# EAGLE board Twatch v2b (EAGLE 5.07)
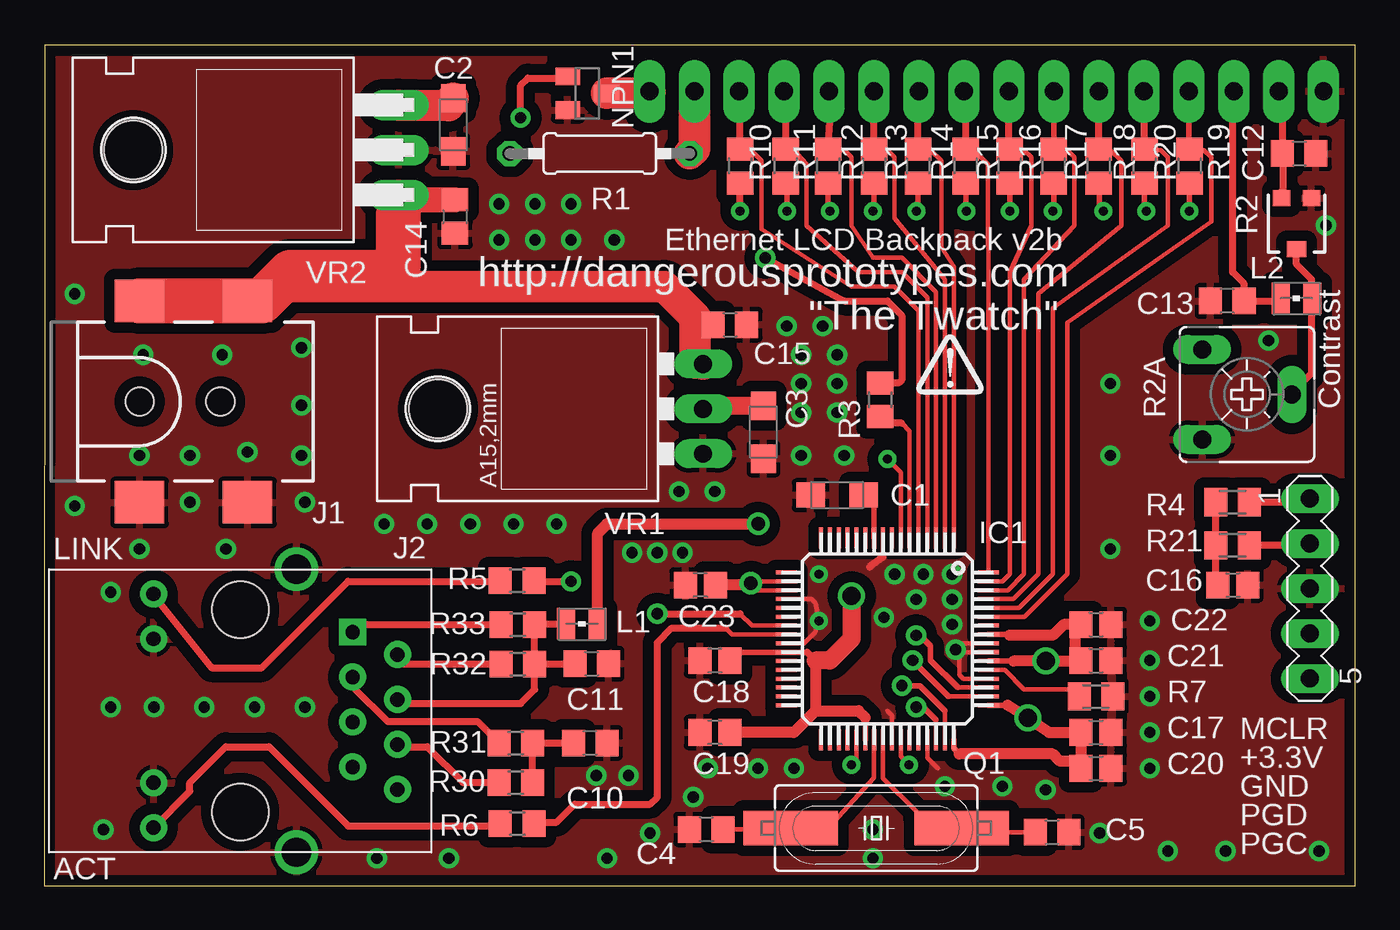
[diagram p0: board, top side]
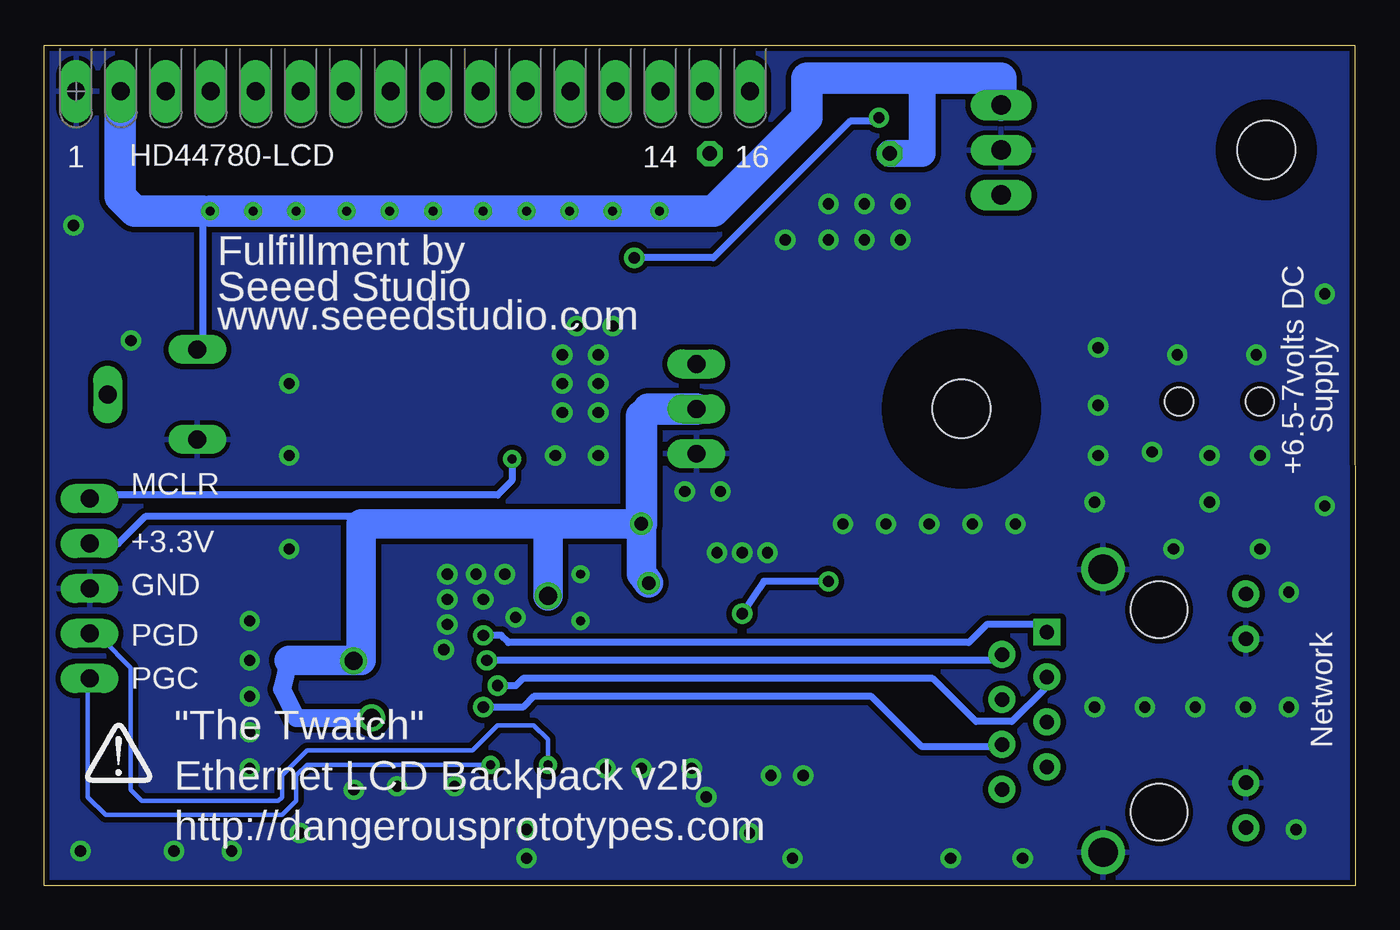
[diagram p1: board, bottom side, seen from below]

Size 74.09 x 47.49 mm. Coordinates in mm from the lower left corner, seen from the top.
Outline: 0,0 74.08,0 74.09,47.49 0.04,47.49 0,0
Copper layers (1*16): Top 0.035mm / dielectric 1.5mm / Bottom 0.035mm
Design rules "SparkFun": minimum track width 8mil, minimum drill 20mil, track to track 8mil, track to pad 8mil, pad to pad 8mil, via to via 8mil, smd to smd 8mil, copper to edge 10mil, drill to drill 8mil, minimum pad ring 12mil, minimum via ring 10mil, stop-mask expansion 4mil, vias tented up to drill 25mil, thermal gap 10mil

## Footprints (pad centres in the part's own frame; a part is rotated, then mirrored left to right if it is on the bottom)
SMC_A = smd 1.6 x 1.4: + -1.5,0; - 1.5,0
C0805 = smd 1.3 x 1.5: 1 -0.95,0; 2 0.95,0
C0805' = smd 1.3 x 1.5: 1 -0.85,0; 2 0.85,0
HD44780 = drill 1.016 pad 1.778 long: 1 -20.325,0.007; 2 -17.785,0.007; 3 -15.245,0.007; 4 -12.705,0.007; 5 -10.165,0.007; 6 -7.625,0.007; 7 -5.085,0.007; 8 -2.545,0.007; 9 -0.005,0.007; 10 2.535,0.007; 11 5.075,0.007; 12 7.615,0.007; 13 10.155,0.007; 14 12.695,0.007; 15 15.235,0.007; 16 17.775,0.007
TQFP64-10X10 = smd 1.2 x 0.229: 1 -5.7,3.75; 2 -5.7,3.25; 3 -5.7,2.75; 4 -5.7,2.25; 5 -5.7,1.75; 6 -5.7,1.25; 7 -5.7,0.75; 8 -5.7,0.25; 9 -5.7,-0.25; 10 -5.7,-0.75; 11 -5.7,-1.25; 12 -5.7,-1.75; 13 -5.7,-2.25; 14 -5.7,-2.75; 15 -5.7,-3.25; 16 -5.7,-3.75; 33 5.7,-3.75; 34 5.7,-3.25; 35 5.7,-2.75; 36 5.7,-2.25; 37 5.7,-1.75; 38 5.7,-1.25; 39 5.7,-0.75; 40 5.7,-0.25; 41 5.7,0.25; 42 5.7,0.75; 43 5.7,1.25; 44 5.7,1.75; 45 5.7,2.25; 46 5.7,2.75; 47 5.7,3.25; 48 5.7,3.75 | smd 0.229 x 1.2: 17 -3.75,-5.7; 18 -3.25,-5.7; 19 -2.75,-5.7; 20 -2.25,-5.7; 21 -1.75,-5.7; 22 -1.25,-5.7; 23 -0.75,-5.7; 24 -0.25,-5.7; 25 0.25,-5.7; 26 0.75,-5.7; 27 1.25,-5.7; 28 1.75,-5.7; 29 2.25,-5.7; 30 2.75,-5.7; 31 3.25,-5.7; 32 3.75,-5.7; 49 3.75,5.7; 50 3.25,5.7; 51 2.75,5.7; 52 2.25,5.7; 53 1.75,5.7; 54 1.25,5.7; 55 0.75,5.7; 56 0.25,5.7; 57 -0.25,5.7; 58 -0.75,5.7; 59 -1.25,5.7; 60 -1.75,5.7; 61 -2.25,5.7; 62 -2.75,5.7; 63 -3.25,5.7; 64 -3.75,5.7
MA05-1 = drill 1.016 long: 1 -5.08,0; 2 -2.54,0; 3 0,0; 4 2.54,0; 5 5.08,0
POWER_JACK_SMD = smd 2.8 x 2.4: GND 0,-5.7; P$4 6.1,-5.7; VIN0 0,5.7; VIN1 6.1,5.7 | hole 1.6: 0,0; 4.572,0
HR911105A = drill 0.813 pad 1.524 square: 1 4.445,-6.35 | drill 0.813 pad 1.524 round: 2 3.175,-8.89; 3 1.905,-6.35; 4 0.635,-8.89; 5 -0.635,-6.35; 6 -1.905,-8.89; 7 -3.175,-6.35; 8 -4.445,-8.89; 9 6.604,4.902; 10 4.064,4.902; 11 -4.064,4.902; 12 -6.604,4.902 | drill 1.651 pad 2.159 round: 13 8.001,-3.175; 14 -8.001,-3.175 | hole 3.2: 5.715,0; -5.715,0
WE-KI_0805_B = smd 1.02 x 1.78: 1 -0.89,0; 2 0.89,0
SOT23 = smd 1 x 1.4: 1 -0.95,-1.1; 2 0.95,-1.1; 3 0,1.1
HC49UP = smd 5.334 x 1.93: 1 -4.826,0; 2 4.826,0
0207/10 = drill 0.813 octagon: 1 -5.08,0; 2 5.08,0
TRIMPOT-3MM = smd 1 x 0.9: 1 -0.85,-1.45; 3 0.85,-1.45 | smd 1.1 x 0.9: 2 0,1.45
CA6V = drill 1.016 long: A -2.54,-2.54; E 2.54,-2.54; S 0,2.54
R0805 = smd 1.3 x 1.5: 1 -0.95,0; 2 0.95,0
M0805 = smd 1.3 x 1.6: 1 -0.95,0; 2 0.95,0
TO220L1 = drill 1.016 long: 1 -2.54,-3.81; 2 0,-3.81; 3 2.54,-3.81 | hole 3.302: 0,11.176
TO220H = drill 1.118 long: 1 -2.54,-10.16; 2 0,-10.16; 3 2.54,-10.16 | hole 3.302: 0,4.826

## Placement (x,y rotation side)
C1  10uF  [SMC_A]  44.81,22.07 180 top
C2  10uF  [SMC_A]  23.11,43 270 top
C3  10uF  [SMC_A]  40.64,25.62 270 top
C4  27pf  [C0805]  37.41,3.17 180 top
C5  27pf  [C0805]  56.95,3.02 0 top
C10  0.1uF  [C0805]  30.85,8.06 180 top
C11  0.1uF  [C0805]  30.94,12.54 0 top
C12  0.1uF  [C0805]  70.92,41.37 0 top
C13  0.1uF  [C0805]  66.85,33.04 180 top
C14  0.1uF  [C0805]  23.22,37.82 270 top
C15  0.1uF  [C0805]  38.75,31.69 0 top
C16  0.1uF  [C0805']  67.16,16.99 0 top
C17  0.1uF  [C0805']  59.44,8.66 0 top
C18  0.1uF  [C0805']  37.9,12.72 180 top
C19  0.1uF  [C0805']  37.9,8.66 180 top
C20  0.1uF  [C0805']  59.44,6.62 0 top
C21  0.1uF  [C0805']  59.44,12.72 0 top
C22  0.1uF  [C0805']  59.44,14.75 0 top
C23  0.1uF  [C0805']  37.08,16.99 180 top
HD44780-LCD  HD44780-LCD  [HD44780]  51.97,44.88 0 bottom
IC1  18F6XJ6X  [TQFP64-10X10]  47.65,13.94 270 top
ICSP  [MA05-1]  71.53,16.78 270 top
J1  POWER_JACKSMD  [POWER_JACK_SMD]  5.38,27.35 0 top
J2  HR911105A  [HR911105A]  11.07,9.88 90 top
L1  ferrite bead  [WE-KI_0805_B]  30.38,14.79 180 top
L2  Ferrite bead  [WE-KI_0805_B]  70.76,33.19 180 top
NPN1  [SOT23]  30.68,44.78 270 top
Q1  25Mhz  [HC49UP]  47.02,3.25 0 top
R1  3R  [0207/10]  31.39,41.37 0 top
R2  TRIMPOTSMD  [TRIMPOT-3MM]  70.76,37.41 180 top
R2A  [CA6V]  67.97,27.76 270 top
R3  100R  [R0805]  47.24,27.45 90 top
R4  390  [M0805]  67.16,21.66 0 top
R5  390R  [R0805]  26.72,17.24 180 top
R6  390R  [R0805]  26.72,3.5 180 top
R7  2k26 1%  [M0805]  59.44,10.69 180 top
R10  10K  [R0805]  39.32,40.66 270 top
R11  10K  [R0805]  41.91,40.66 270 top
R12  10K  [R0805]  44.3,40.66 270 top
R13  10K  [R0805]  46.89,40.66 270 top
R14  10K  [R0805]  49.38,40.66 270 top
R15  10K  [R0805]  52.07,40.66 270 top
R16  10K  [R0805]  54.56,40.66 270 top
R17  10K  [R0805]  57.05,40.66 270 top
R18  10K  [R0805]  59.59,40.66 270 top
R19  10K  [R0805]  62.18,40.66 270 top
R20  10K  [R0805]  64.72,40.66 270 top
R21  10k  [M0805]  67.16,19.22 0 top
R30  49R9 1%  [R0805]  26.66,5.82 0 top
R31  49R9 1%  [R0805]  26.66,8.05 0 top
R32  49R9 1%  [R0805]  26.77,12.52 0 top
R33  49R9 1%  [R0805]  26.77,14.74 0 top
U$1  [DP-LOGO-BOTTOM]  67.97,5.81 0 top
U$2  [DP-LOGO_TOP]  49.28,27.76 0 top
VR1  LD117AV  [TO220L1]  33.43,26.94 90 top
VR2  7805T  [TO220H]  9.86,41.57 90 top

## Library data of the parts
C1-C5 C10-C15 R1 R3-R7 R10-R21 R30-R33 = rcl
C16-C23 = quantum-sensor
HD44780-LCD = lcd-hd44780
IC1 = microchip_enet
ICSP = con-lstb
J1 NPN1 R2 = SparkFun
J2 = CONNECTER
L1 L2 = wuerth-elektronik
Q1 = crystal
R2A = pot
U$1 U$2 = DP-logo
VR1 = v-reg
VR2 = linear

## Nets
+5V: C2.+ C12.1 HD44780-LCD.2 R1.1 R2.3 R2A.A R10.2 R11.2 R12.2 R13.2 R14.2 R15.2 R16.2 R17.2 R18.2 R19.2 R20.2 VR2.3
CCT: C11.1 J2.4 L1.2 R32.2 R33.2
GND: C1.- C2.- C3.- C4.2 C5.2 C10.1 C11.2 C12.2 C13.2 C14.2 C15.2 C16.2 C17.2 C18.2 C19.2 C20.2 C21.2 C22.2 C23.2 HD44780-LCD.1 IC1.9 IC1.20 IC1.25 IC1.41 IC1.45 IC1.52 IC1.55 IC1.56 ICSP.3 J1.GND J1.P$4 J2.10 J2.11 J2.13 J2.14 NPN1.2 R2.1 R2A.E R7.1 VR1.1 VR2.2
LCD_BL: IC1.6 R3.1
LCD_D0: HD44780-LCD.7 IC1.62 R17.1
LCD_D1: HD44780-LCD.8 IC1.63 R16.1
LCD_D2: HD44780-LCD.9 IC1.64 R15.1
LCD_D3: HD44780-LCD.10 IC1.1 R14.1
LCD_D4: HD44780-LCD.11 IC1.2 R13.1
LCD_D5: HD44780-LCD.12 IC1.3 R12.1
LCD_D6: HD44780-LCD.13 IC1.4 R11.1
LCD_D7: HD44780-LCD.14 IC1.5 R10.1
LCD_E: HD44780-LCD.6 IC1.61 R18.1
LCD_RS: HD44780-LCD.4 IC1.59 R20.1
LCD_RW: HD44780-LCD.5 IC1.60 R19.1
LED_A: IC1.24 R6.1
LED_B: IC1.23 R5.1
LED_LINK: J2.9 R5.2
LED_STATUS: J2.12 R6.2
MCLR: IC1.7 ICSP.1 R4.2
N$10: L2.1 R2.2 R2A.S
N$11: NPN1.1 R3.2
N$14: C1.+ IC1.10
N$15: C4.1 IC1.39 Q1.1
N$16: C5.1 IC1.40 Q1.2
N$17: C13.1 HD44780-LCD.3 L2.2
N$18: HD44780-LCD.15 R1.2
N$20: HD44780-LCD.16 NPN1.3
N$22: C10.2 R30.2 R31.2
N$24: C16.1 R4.1 R21.1
N$50: IC1.53 R7.2
PGC: IC1.42 ICSP.5
PGD: IC1.37 ICSP.4
RD+: IC1.47 J2.3 R31.1
RD-: IC1.46 J2.6 R30.1
TD+: IC1.51 J2.1 R33.1
TD-: IC1.50 J2.2 R32.1
V+: C3.+ C17.1 C18.1 C19.1 C20.1 C21.1 C22.1 C23.1 IC1.18 IC1.19 IC1.26 IC1.38 IC1.48 IC1.49 IC1.54 IC1.57 ICSP.2 L1.1 R21.2 VR1.2
VBAT: C14.1 C15.1 J1.VIN0 VR1.3 VR2.1

## Tracks (layer width: path | path; a pad name or v marks a point on that pad's centre or on a via)
+5V  (via drill 0.51)
  Top 0.305: v41.96,38.12 41.96,39.66 R11.2 | R12.2 44.3,38.22 v44.4,38.12 | R13.2 46.89,38.17 v46.84,38.12 | R14.2 49.38,38.22 v49.28,38.12 | R15.2 52.07,38.17 v52.12,38.12 | v54.56,38.12 R16.2 | R17.2 57.05,38.17 v57,38.12 | R18.2 59.64,39.66 59.64,38.32 v59.84,38.12 | R19.2 62.18,38.22 v62.28,38.12 | v64.72,38.12 R20.2
  Top 0.406: R19.2 62.38,39.51 | 69.97,42.39 69.97,44.67 HD44780-LCD.2 | 69.97,42.39 C12.1 | R2.3 69.91,39.22 70,39.14 69.97,42.39 | v39.32,38.12 R10.2
  Top 1.778: VR2.3 22.84,44.09 22.84,44.22 C2.+
  Bottom 0.305: HD44780-LCD.2 69.6,44.73 | v64.72,38.12 65.13,38.12
  Bottom 0.406: 69.97,43.2 69.97,44.67 HD44780-LCD.2 | v39.32,38.12 v41.96,38.12 | 65.13,38.12 65.13,30.6 R2A.A
  Bottom 0.61: 69.8,44.43 HD44780-LCD.2
  Bottom 1.524: R1.1 24.49,41.37 24.49,45.64
  Bottom 1.778: v64.72,38.12 v62.28,38.12 v59.84,38.12 v57,38.12 v54.56,38.12 v52.12,38.12 v49.28,38.12 v46.84,38.12 v44.4,38.12 v41.96,38.12 v39.32,38.12 36.27,38.12 30.99,43.4 30.99,45.64 24.49,45.64 20.02,45.64 VR2.3 | 65.13,38.12 68.99,38.12 69.8,38.93 69.8,44.43
CCT
  Top 0.254: 29.56,12.52 C11.1 | R33.2 27.77,14.79
  Top 0.406: R32.2 R33.2 | R32.2 27.72,11.08 26.92,10.28 20.19,10.28 J2.4 | R32.2 29.56,12.52 | 27.77,14.79 L1.2
GND  (via drill 0.51, 0.64)
  Top 0.254: IC1.25 42.93,13.69 43.59,14.35 v43.79,14.96 43.59,15.97 43.37,16.19 IC1.20 | IC1.52 51.93,11.69 51.71,11.91 51.71,13.13 51.78,13.19 | 51.78,13.19 IC1.55 | IC1.56 51.87,13.69 51.71,13.53 51.71,13.25 51.78,13.19 | IC1.9 47.4,18.57 | IC1.45 49.9,7.22 50.5,6.62 | IC1.41 47.9,9.63 47.65,9.88
  Top 0.406: 47.4,18.57 46.63,18
  other vias: 11.89,10.08 72.03,1.95 43.79,17.6 31.19,6.22 33.22,18.82 59.64,2.97 34.24,2.97 56.59,5.41 36.07,18.82 34.65,18.82 26.52,20.44 47.45,15.16 62.48,14.96 62.48,12.72 62.48,10.69 62.48,8.66 72.44,37.31 27.74,38.53 32.21,36.49 27.74,36.49 29.77,38.53 46.84,1.54 46.84,3.17 60.25,19.02 60.25,24.3 60.25,28.37 50.9,5.61 54.15,5.61 42.37,6.62 40.34,6.62 37.49,6.62 25.7,38.53 29.77,36.49 25.7,36.49 69.19,30.81 45.21,24.3 42.77,24.3 33.02,6.22 35.86,22.27 37.9,22.27 10.26,19.02 19.2,20.44 24.08,20.44 28.96,20.44 51.31,17.6 48.06,17.6 51.31,16.17 51.51,13.33 41.96,31.62 44.81,28.37 62.48,6.62 63.5,1.95 31.8,1.54 6.2,10.08 9.04,10.08 3.76,10.08 3.76,16.58 3.35,3.17 14.73,10.08 14.73,21.66 11.48,24.51 8.23,21.66 5.38,19.02 1.73,21.46 5.38,24.3 8.23,24.3 14.53,24.3 14.53,27.15 14.53,30.4 10.06,29.99 5.59,29.99 36.68,5 1.73,33.45 49.68,17.6 49.28,16.17 51.31,14.75 42.77,28.37 42.77,29.99 44.81,29.99 43.99,31.62 44.81,26.74 42.77,26.74 21.64,20.44 66.75,1.95 22.86,1.54 18.8,1.54
  pour Top (isolate 0.61): -0.3,47.67 74.73,47.67 75.13,-0.94 0.1,-0.54
  pour Bottom (isolate 0.305): -0.3,47.72 75.54,47.72 75.95,0.27 0.1,0.27
LCD_BL
  Top 0.254: IC1.6 48.9,25.69 48.46,26.13 | 47.62,26.13 R3.1
  Top 0.406: 48.46,26.13 47.62,26.13
LCD_D0
  Top 0.254: IC1.62 54.46,16.69 55.37,17.6 55.37,34.26 58.22,37.31 58.22,41.17 57.81,41.57 57.08,41.57 R17.1
  Top 0.305: R17.1 HD44780-LCD.7
LCD_D1
  Top 0.254: IC1.63 54.15,17.19 54.56,17.6 54.56,34.67 55.78,37.31 55.78,41.17 55.37,41.57 54.6,41.57 R16.1
  Top 0.406: HD44780-LCD.8 54.51,41.66 R16.1
LCD_D2
  Top 0.254: IC1.64 53.35,35.08 53.34,37.31 53.34,40.76 52.53,41.57 52.11,41.57 R15.1
  Top 0.406: R15.1 52.07,44.79 HD44780-LCD.9
  Bottom 0.305: HD44780-LCD.9 52.07,44.79
LCD_D3
  Top 0.254: IC1.1 51.4,34.98 50.7,36.09 50.7,40.97 50.09,41.57 49.41,41.57 R14.1
  Top 0.406: R14.1 49.38,44.83 HD44780-LCD.10
LCD_D4
  Top 0.254: IC1.2 50.9,34.26 48.06,37.71 48.06,41.17 47.65,41.57 46.92,41.57 R13.1
  Top 0.406: R13.1 HD44780-LCD.11
LCD_D5
  Top 0.254: IC1.3 50.4,33.54 48.46,35.48 46.84,35.48 45.62,37.31 45.62,41.17 45.21,41.57 44.54,41.57 R12.1
  Top 0.406: R12.1 44.5,44.74 HD44780-LCD.12
LCD_D6
  Top 0.254: IC1.4 49.9,33.23 48.46,34.67 46.03,34.67 43.08,37.31 43.08,40.76 42.37,41.57 41.95,41.57 R11.1
  Top 0.406: R11.1 41.91,44.79 HD44780-LCD.13
LCD_D7
  Top 0.254: R10.1 39.89,41.61 40.54,40.97 40.54,37.1 45.62,33.85 48.06,33.85 49.4,32.51 IC1.5
  Top 0.406: R10.1 39.32,44.22 39.12,44.42 39.12,44.73 HD44780-LCD.14
LCD_E
  Top 0.254: IC1.61 54.78,16.19 56.19,17.6 56.19,33.45 60.86,37.31 60.86,40.97 60.25,41.57 59.62,41.57 R18.1
  Top 0.406: R18.1 HD44780-LCD.6
LCD_RS
  Top 0.254: IC1.59 55.4,15.19 57.81,17.6 57.81,31.82 65.94,37.51 65.94,41.17 65.53,41.57 64.76,41.57 R20.1
  Top 0.305: HD44780-LCD.4 64.67,41.66 R20.1
LCD_RW
  Top 0.254: IC1.60 55.09,15.69 57,17.6 57,32.63 63.5,37.31 63.5,41.17 63.09,41.57 62.22,41.57 R19.1
  Top 0.406: R19.1 62.18,44.84 HD44780-LCD.5
LED_A
  Top 0.254: IC1.24 38.87,14.19 38.51,14.55
  Top 0.406: 38.51,14.55 35.46,14.55 34.65,13.74 34.65,5 34.24,4.59 29.97,4.59 28.96,3.58 27.75,3.58 R6.1
LED_B  (via drill 0.64)
  Top 0.254: IC1.23 39.99,14.69 39.32,15.36 | R5.1 27.72,17.19
  Top 0.406: v34.65,15.36 39.32,15.36 | 27.72,17.19 v29.77,17.19
  Bottom 0.406: v34.65,15.36 33.43,17.19 v29.77,17.19
LED_LINK
  Top 0.254: 6.17,16.4 J2.9
  Top 0.406: 6.17,16.4 9.45,12.31 12.29,12.31 17.17,17.19 25.72,17.19 R5.2
LED_STATUS
  Top 0.406: J2.12 8.23,5.33 8.23,5.81 10.26,7.84 12.7,7.84 17.17,3.37 25.64,3.37 R6.2
MCLR  (via drill 0.51)
  Top 0.254: IC1.7 48.4,23.35 v47.65,24.1 | ICSP.1 71.73,21.66
  Top 0.406: 71.73,21.66 R4.2
  Bottom 0.406: v47.65,24.1 47.65,22.88 48.46,22.07 71.32,22.07 ICSP.1
N$10
  Top 0.406: R2A.S 70.41,27.76 71.63,28.98 71.63,32.23 71.65,32.25 L2.1 71.63,33.22 71.63,34.26 70.76,35.12 R2.2
N$11  (via drill 0.64)
  Top 0.254: 29.5,45.64 NPN1.1
  Top 0.406: R3.2 48.3,28.4 48.46,28.57 48.46,32.23 47.65,33.04 45.21,33.04 v40.74,35.48 | v26.92,43.4 26.92,45.23 27.33,45.64 29.5,45.64
  Bottom 0.406: v40.74,35.48 36.27,35.48 28.55,43.2 27.33,43.2 v26.92,43.4
N$14
  Top 0.254: 46.9,21.72 C1.+
  Top 0.305: IC1.10 46.9,21.72
N$15
  Top 0.254: C4.1 41.55,3.17 | 41.55,3.17 42.11,3.98 Q1.1 | IC1.39 46.9,6.08 44.6,3.58 42.16,3.37 41.55,3.17
N$16
  Top 0.254: C5.1 51.61,3.02 Q1.2 50.9,3.78 49.28,3.78 49.28,4.19 47.4,6.06 IC1.40
N$17
  Top 0.406: 67.29,44.81 HD44780-LCD.3 67.16,44.83 67.16,34.67 67.8,34.02 C13.1 69.72,33.04 L2.2
N$18
  Top 1.778: HD44780-LCD.15 36.73,41.63 R1.2
N$20
  Top 1.27: 34.24,44.83 34.24,44.84 HD44780-LCD.16
  Top 1.778: NPN1.3 33.82,44.81 34.24,44.83
N$22
  Top 0.254: R31.2 27.62,8.06
  Top 0.406: R30.2 R31.2 | 27.62,8.06 C10.2
N$24
  Top 0.254: C16.1 66.21,16.68
  Top 0.406: 66.21,16.68 R21.1 R4.1
N$50
  Top 0.254: IC1.53 54.28,12.19 55.37,11.09 58.08,11.09 R7.2
PGC  (via drill 0.51)
  Top 0.254: IC1.42 48.4,7.3 v48.87,6.83
  Bottom 0.254: ICSP.5 71.63,11.6 71.63,5 70.61,3.98 60.66,3.98 59.84,4.8 59.84,6.22 59.23,6.83 v48.87,6.83
PGD  (via drill 0.51)
  Top 0.254: IC1.37 45.9,7.11 v45.62,6.83
  Bottom 0.254: v45.62,6.83 45.62,8.25 46.43,9.06 48.46,9.06 49.89,7.64 59.23,7.64 60.66,6.22 60.66,5 60.86,4.8 68.58,4.8 69.19,5.41 69.19,12.31 70.82,13.94 71.22,13.94 ICSP.4
RD+  (via drill 0.64)
  Top 0.254: 50.9,9.88 IC1.47
  Top 0.305: v48.46,11.3 49.48,11.3 50.9,9.88
  Top 0.406: J2.3 17.58,11.63 17.58,11.09 19.41,9.27 24.49,9.27 R31.1
  Bottom 0.406: J2.3 17.58,11.63 17.58,11.09 19.41,9.27 21.44,9.27 23.88,11.7 47.04,11.7 47.45,11.3 v48.46,11.3
RD-  (via drill 0.64)
  Top 0.254: 50.4,9.36 IC1.46
  Top 0.305: 50.4,9.36 49.68,10.08 v49.28,10.08
  Top 0.406: R30.1 23.66,5.82 21.64,7.84 20.09,7.84 J2.6
  Bottom 0.406: J2.6 20.09,7.84 24.49,7.84 27.33,10.69 46.43,10.69 47.04,10.08 v49.28,10.08
TD+  (via drill 0.64)
  Top 0.254: 51.62,11.19 IC1.51
  Top 0.305: 51.62,11.19 50.09,12.72 50.09,13.53 49.68,13.94 49.48,13.94
  Top 0.406: J2.1 17.55,14.32 17.98,14.75 25.81,14.75 R33.1 | v49.28,14.14 49.48,13.94
  Bottom 0.406: J2.1 17.86,14.75 20.83,14.75 21.84,13.74 47.85,13.74 48.26,14.14 v49.28,14.14
TD-  (via drill 0.64)
  Top 0.254: 51.1,10.69 IC1.50
  Top 0.305: v49.07,12.72 51.1,10.69
  Top 0.406: R32.1 20.09,12.52 J2.2
  Bottom 0.254: 20.22,12.92 20.02,12.72 | J2.2 20.09,12.92
  Bottom 0.406: 20.09,12.92 20.22,12.92 | v49.07,12.72 20.3,12.72 J2.2
V+  (via drill 0.76, 1.02)
  Top 0.254: C17.1 58.27,8.97 | 38.81,13.19 C18.1 | v56.59,12.71 58.28,12.72 C21.1 58.57,12.71 | 58.28,14.44 C22.1 | 58.59,7.42 58.19,7.02 58.18,7.03 | ICSP.2 71.43,19.22 | IC1.18 39.93,17.19 v39.93,17.1 | IC1.19 39.93,16.69 v39.93,17.1 | v39.93,17.1 39.93,16.99
  Top 0.305: 54.79,12.69 IC1.54 | 38.81,13.19 IC1.26 43.12,13.19 | 46.4,9.5 IC1.38 | IC1.48 51.4,7.75 51.71,7.44 | IC1.57 54.51,14.19 54.56,14.14 | 54.45,10.19 IC1.49
  Top 0.406: 43.59,12.72 43.12,13.19 | 71.43,19.22 R21.2
  Top 0.61: L1.1 31.27,19.91 31.8,20.44 v40.34,20.44 | C22.1 57.61,14.75 57,14.14 54.56,14.14 | 54.79,12.69 v56.59,12.71 58.57,12.71 | 58.28,12.72 58.28,14.44 | 58.19,7.02 C20.1 | 46.4,9.5 46.03,9.88 43.59,9.88 | 43.59,9.88 42.37,8.66 C19.1 | 58.59,7.42 C17.1 56.79,8.66 v55.58,9.47 54.45,10.19 | 58.18,7.03 57.4,7.03 57,7.44 51.71,7.44 | 43.59,12.72 43.59,9.88 | 39.93,16.99 C23.1
  Top 1.016: 43.59,12.72 44.4,12.72 45.62,13.94 v45.62,16.38 | C3.+ 37.42,27.12 VR1.2
  Bottom 0.254: v56.59,12.71 56.61,12.72
  Bottom 0.406: v55.58,9.47 55.98,9.06 | ICSP.2 69.9,19.32 68.38,20.85 56.19,20.85 56.19,20.44
  Bottom 1.016: 40.34,26.54 39.93,26.94 | 60.25,12.72 60.66,11.09 59.84,9.47 v55.58,9.47 | 56.58,12.72 v56.59,12.71
  Bottom 1.422: v40.34,20.44 40.63,20.44
  Bottom 1.676: 45.62,20.44 56.19,20.44 56.19,12.72 56.58,12.72 | 56.61,12.72 60.25,12.72 | 40.63,20.44 45.62,20.44 | 45.62,20.44 v45.62,16.38 | v39.93,17.1 40.13,17.39 40.34,17.6 v40.34,20.44
  Bottom 1.778: 39.93,26.94 VR1.2 | v40.34,20.44 40.34,26.54
VBAT
  Top 1.016: VR1.3 37.01,31.52 C15.1
  Top 1.422: C14.1 20.28,38.77 VR2.1
  Top 1.778: 13.13,33.85 35.05,33.85 36.78,32.13 36.78,29.54 37.19,29.54 VR1.3 | 20.02,37.92 VR2.1
  Top 2.54: J1.VIN0 12.3,33.05 13.92,34.67 | 13.92,34.67 19.61,34.67 | 19.61,34.67 | 20.02,37.92 20.02,35.07 19.61,34.67 | 13.13,33.85 13.13,33.88 13.92,34.67

## Text on the board
tNames: Ethernet LCD Backpack v2b | http://dangerousprototypes.com | "The Twatch" | Contrast | J1 | LINK | MCLR | +3.3V | GND | PGD | PGC | ACT
bNames: +6.5-7volts DC | Fulfillment by | Seeed Studio | www.seeedstudio.com | Supply | MCLR | +3.3V | GND | Network | PGD | PGC | "The Twatch" | Ethernet LCD Backpack v2b | http://dangerousprototypes.com
tValues: RA0 | RA1 | GND | V+ | GND | RB15 | MCLR | V+ | GND | PGD3 | PGC3
Reference: HD44780 LCD header | Contrast adjustment | MCLR | Power supply | +6.5-7volt DC | +3.3V | GND | PGD | PGC | Programming header | ETHERNET LCD BACKPACK v2b | Ethernet | CC-BY-SA-NC | Ian Lesnet 2009 | http://dangerousprototypes.com